# Altium PCB EPCU.PcbDoc
Units mil, origin at the board's own origin, x right, y up, seen from the top; angles counter-clockwise.
Board outline 6000 x 4000 mil, 2 copper layers (Top Layer, Bottom Layer); 99 components, 82 nets, 364 pads, 0 vias.
Unrouted connection lines stored in the file: 264.
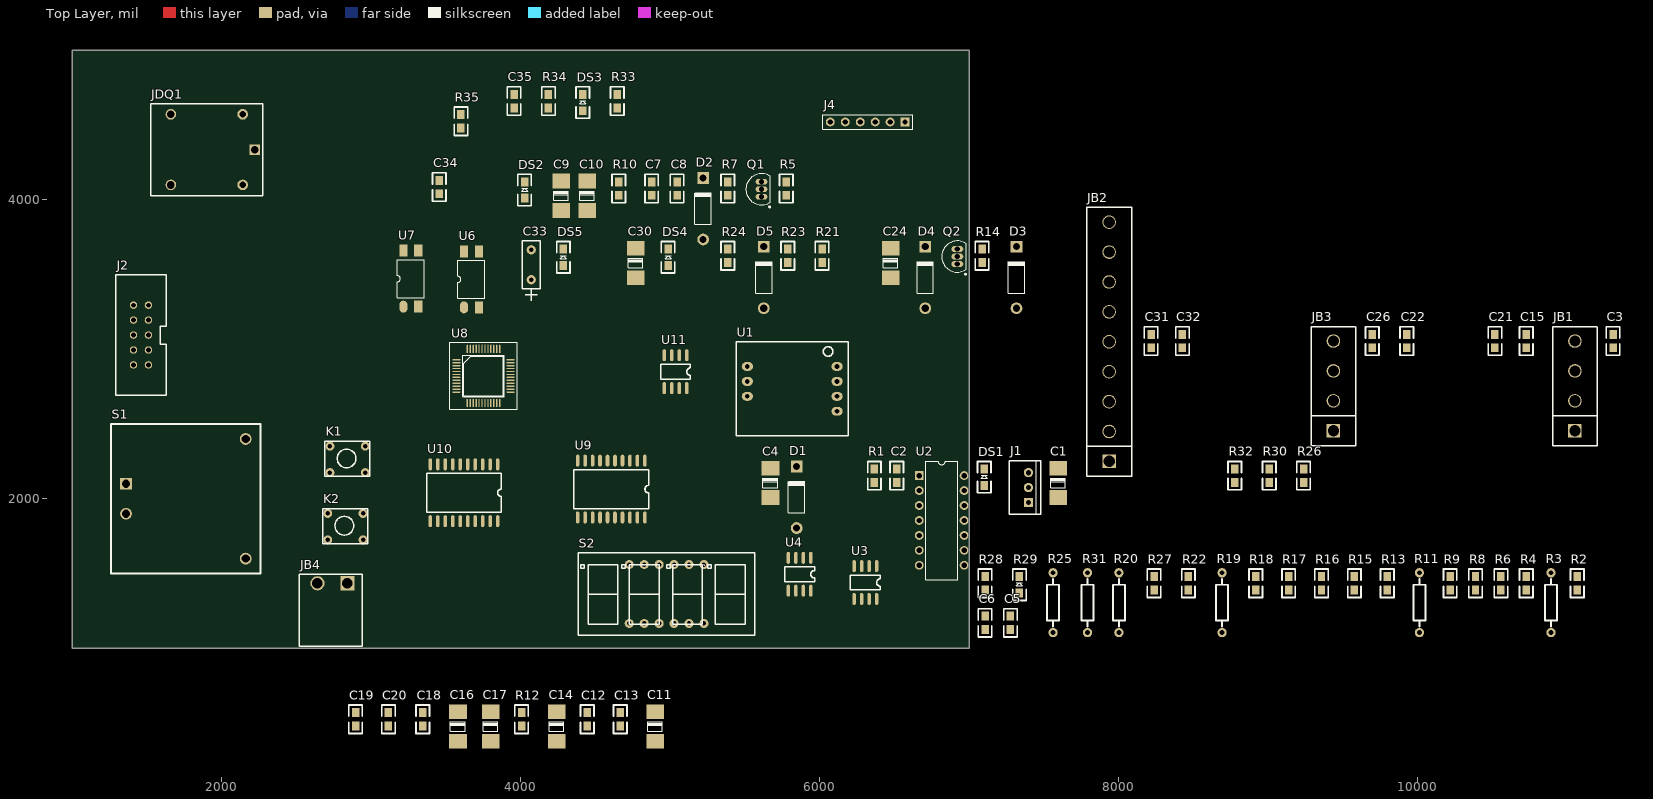
[diagram p0: Top Layer view]
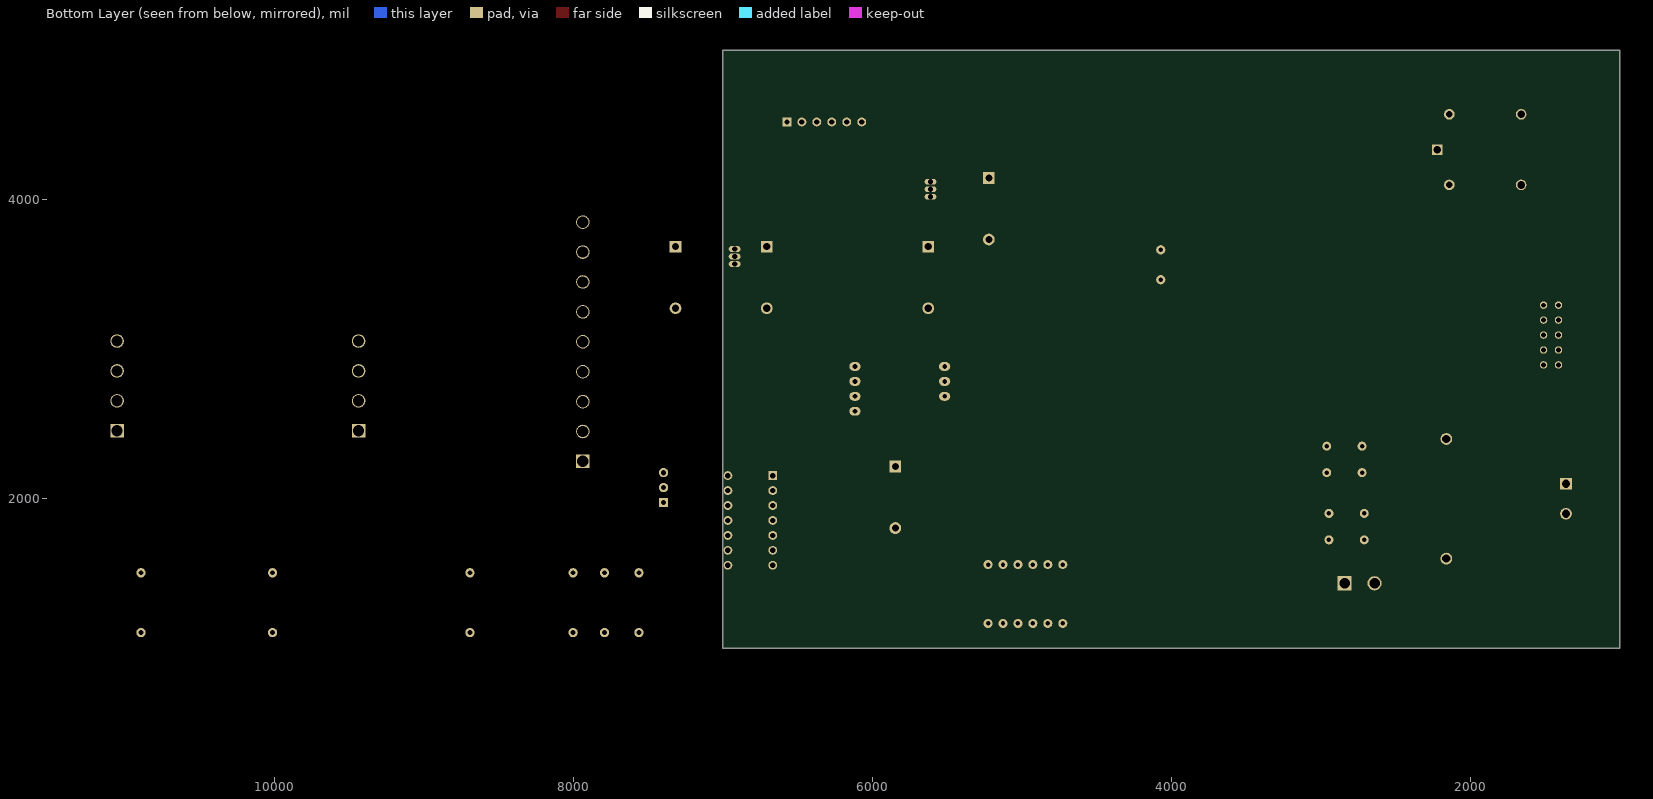
[diagram p1: Bottom Layer view, seen from below]

## Layer stack, top to bottom
Top Solder: solder mask 0.4, Solder Resist, Dk 3.5
Top Layer: signal copper 1.4
Dielectric 1: dielectric 12.6, FR-4, Dk 4.8
Bottom Layer: signal copper 1.4
Bottom Solder: solder mask 0.4, Solder Resist, Dk 3.5

## Board outline
1000,1000 7000,1000 7000,5000 1000,5000

## Design rules (kind name [scope] priority, off if disabled: settings)
Clearance [All] p1: gap=10
PolygonConnect [All] p1: connectstyle=Relief reliefconductorwidth=10 reliefentries=4 polygonreliefangle="90 Angle" airgapwidth=10
RoutingVias [All] p1: holewidth=28 width=50 viastyle="Through Hole" minholewidth=28 minwidth=50 maxholewidth=28 maxwidth=50
SolderMaskExpansion [All] p1: expansion=4
Width [All] p1: maxlimit=10 minlimit=10 preferedwidth=10
30 further rules are at their usual default settings.

## Components (designator, comment, footprint, x,y, rotation, side; value= is the part's Value field where it differs from the comment)
C1 "10uF/16V/C" 106E 7595,2205 r90 top
C2 "0.1uF" 0805 6515,2110 r90 top
C3 "104/50V" 0805 11305,3010 r90 top
C4 "10uF/16V/C" 106E 5670,2205 r90 top
C5 "104" 0805 7275,1125 r90 top
C6 "104/50V" 0805 7105,1125 r90 top
C7 "1uF" 0805 4875,4030 r90 top
C8 "0.1uF" 0805 5045,4030 r90 top
C9 "10uF" 106E 4270,4125 r90 top
C10 "10uF" 106E 4445,4125 r90 top
C11 "10uF/16V/C" 106E 4900,575 r90 top
C12 "0.1uf" 0805 4445,480 r90 top
C13 "0.1uf" 0805 4665,480 r90 top
C14 "4.7uF" 106E 4240,575 r90 top
C15 "104" 0805 10725,3010 r90 top
C16 "10uF" 106E 3580,575 r90 top
C17 "10uF" 106E 3800,575 r90 top
C18 "0.1uf" 0805 3345,480 r90 top
C19 "0.1uf" 0805 2895,480 r90 top
C20 "0.1uf" 0805 3115,480 r90 top
C21 "104/50V" 0805 10515,3010 r90 top
C22 "104/50V" 0805 9925,3010 r90 top
C24 "10uF/16V/C" 106E 6475,3675 r90 top
C26 "104" 0805 9695,3010 r90 top
C30 "10uF/16V/C" 106E 4770,3675 r90 top
C31 "104/50V" 0805 8215,3010 r90 top
C32 "104" 0805 8425,3010 r90 top
C33 "10uF" RB.2/.4 4070,3465 r90 top
C34 "104" 0805 3455,4040 r90 top
C35 "104" 0805 3955,4615 r90 top
D1 "1N4007" DO-41 5845,2010 r90 top
D2 "1N4007" DO-41 5220,3940 r90 top
D3 "1N4007" DO-41 7315,3480 r90 top
D4 "1N4007" DO-41 6705,3480 r90 top
D5 "Diode 1N4001" DO-41 5625,3480 r90 top
DS1 "red" 1206DIODE#1 7135,2105 r90 top
DS2 "red" 1206DIODE#1 4060,4025 r90 top
DS3 "green" 1206DIODE#1 4450,4610 r90 top
DS4 "LED1" 1206DIODE#1 5020,3575 r90 top
DS5 "LED1" 1206DIODE#1 4320,3575 r90 top
J1 "HEADER 3" 254-3 7395,1975 r90 top
J2 "JTAG" DC3-10P 1510,2895 r90 top
J4 "Header 6" HDR1X6 6570,4520 r180 top
JB1 "CON4" SIP4 11050,2455 r90 top
JB2 "CON9" SIP9 7935,2250 r90 top
JB3 "CON4" SIP4 9435,2455 r90 top
JB4 "CON2" POWER2 2840,1435 r180 top
JDQ1 "RELAY" jidianqi_12VDC 2220,4335 r0 top
K1 "KEY6" KEY6 2960,2175 r90 top
K2 "KEY6" KEY6 2945,1725 r90 top
Q1 "9013" TO-226-AA 5610,4070 r0 top
Q2 "9013" TO-226-AA 6920,3620 r0 top
R1 "4.7K" 0805 6365,2110 r90 top
R2 "10K" 0805 11065,1390 r90 top
R3 "250欧" AXIAL0.4 10890,1105 r90 top
R4 "10K" 0805 10725,1390 r90 top
R5 "1K" 0805 5775,4030 r90 top
R6 "1K" 0805 10555,1390 r90 top
R7 "1K" 0805 5385,4030 r90 top
R8 "10K" 0805 10385,1390 r90 top
R9 "10K" 0805 10215,1390 r90 top
R10 "2R" 0805 4655,4030 r90 top
R11 "250欧" AXIAL0.4 10010,1105 r90 top
R12 "4.7K" 0805 4005,480 r90 top
R13 "10K" 0805 9795,1390 r90 top
R14 "0R" 0805 7085,3580 r90 top
R15 "10K" 0805 9575,1390 r90 top
R16 "1K" 0805 9355,1390 r90 top
R17 "10K" 0805 9135,1390 r90 top
R18 "10K" 0805 8915,1390 r90 top
R19 "250欧" AXIAL0.4 8690,1105 r90 top
R20 "100K欧" AXIAL0.4 8000,1105 r90 top
R21 "4.7K" 0805 6015,3580 r90 top
R22 "511" 0805 8465,1390 r90 top
R23 "4.7K" 0805 5785,3580 r90 top
R24 "4.7K" 0805 5385,3580 r90 top
R25 "8.87K" AXIAL0.4 7560,1105 r90 top
R26 "511" 0805 9235,2110 r90 top
R27 "5.1K" 0805 8235,1390 r90 top
R28 "511" 0805 7105,1390 r90 top
R29 "511" 1206DIODE#2 7335,1370 r90 top
R30 "511" 0805 9005,2110 r90 top
R31 "250欧" AXIAL0.4 7790,1105 r90 top
R32 "511" 0805 8775,2110 r90 top
R33 "4.7K" 0805 4645,4615 r90 top
R34 "4.7K" 0805 4185,4615 r90 top
R35 "4.7K" 0805 3600,4480 r90 top
S1 "HDW24S5" HDW24S5 1360,2100 r0 top
S2 "LEDS4-14" LEDS4-14 5225,1560 r180 top
U1 "" CYM1050T 6115,2885 r180 top
U2 "LM324" lm324 6665,2155 r0 top
U3 "IRF7853PBF" SOP-8 6380,1550 r270 top
U4 "IRF7853PBF" SO-8 5940,1605 r270 top
U6 "TLP521-1" TLP521-1 3620,3280 r90 top
U7 "TLP521-1" TLP521-1 3215,3285 r90 top
U8 "C8051F500" TQFP-48 3570,2930 r0 top
U9 "74ALS574" SOL-20 4830,2255 r270 top
U10 "74ALS574" SOL-20 3845,2230 r270 top
U11 "AT24C64A" SO-8 5110,2960 r270 top

## Footprints (in the part's own frame and the unit in brackets; to place one, negate y for a bottom-side part, rotate by r counter-clockwise, add the part's x,y. Pads: shape width x height; smd on the part's side, far side on the other; paste and mask are expansions set on the pad)
106E [mm]
  rect 2.5x3 smd: 1(0,0) 2(-5,0)
  silkscreen extent -3.3,-1.2 -1.7,1.3
254-3 [mil]
  rect 62x62 hole 35.43: 1(0,0)
  round 62 hole 35.43: 2(100,0) 3(200,0)
  silkscreen extent -79,-82 280,127
0805 [mil]
  rect 60x50 smd: 1(0,0) 2(90,0)
  silkscreen extent -50,-45 140,45
1206DIODE#1 [mil]
  rect 60x50 smd: 1(-15,35) 2(95,35)
  silkscreen extent -65,-10 145,80
1206DIODE#2 [mil]
  rect 60x50 smd: 1(0,0) 2(110,0)
  silkscreen extent -50,-45 160,45
AXIAL0.4 [mil]
  round 62 hole 32: 1(0,0) 2(400,0)
  silkscreen extent 40,-40 360,40
CYM1050T [mm]
  oval 1.9x1.5 hole 0.8: 1(0,0) 2(0,2.54) 3(0,5.08) 4(0,7.62) 6(15.24,5.08) 7(15.24,2.54) 8(15.24,0)
  silkscreen extent -1.88,-4.19 17.12,11.81
DC3-10P [mil]
  round 50 hole 32: 1(0,0) 2(0,100) 3(100,0) 4(100,100) 5(200,0) 6(200,100) 7(300,0) 8(300,100) 9(400,0) 10(400,100)
  silkscreen extent -203,-120 602,218
DO-41 [mm] "Diode, Axial; Body 5.2 x 2.7 mm (LxDia. max), Lead Dia. 0.86 mm (max)"
  round 2 hole 1.2: 1(-5.23,0)
  rect 2x2 hole 1.2: 2(5.23,0)
  silkscreen extent -2.65,-1.4 2.75,1.4
HDR1X6 [mm] "Connector; Header; 6 Position"
  rect 1.5x1.5 hole 0.9: 1(0,0)
  round 1.5 hole 0.9: 2(2.54,0) 3(5.08,0) 4(7.62,0) 5(10.16,0) 6(12.7,0)
  silkscreen extent -1.27,-1.27 13.97,1.27
HDW24S5 [mm]
  rect 2x2 hole 1.4: 1(0,0)
  round 2 hole 1.4: 2(0,-5.08) 3(20.32,-12.7) 5(20.32,7.62)
  silkscreen extent -2.54,-15.24 22.86,10.16
jidianqi_12VDC [mm]
  rect 1.8x1.8 hole 1.3: 1(0,0)
  round 1.8 hole 1.1: 2(-2.032,5.994) 5(-2.032,-5.994)
  round 1.8 hole 1.3: 3(-14.224,5.994) 4(-14.224,-5.994)
  silkscreen extent -17.65,-7.85 1.4,7.77
KEY6 [mil]
  round 60 hole 30: 1(0,236.22) 1(0,0) 2(177.17,236.22) 2(177.17,0)
  silkscreen extent -25,-30 210,270
LEDS4-14 [mil]
  round 60 hole 30: 1(100,393.7) 2(500,393.7) 3(300,0) 4(100,0) 5(0,0) 6(200,393.7) 7(400,0) 8(200,0) 9(0,393.7) 10(300,393.7) 11(400,393.7) 12(500,0)
  silkscreen extent -341,-79 841,472
lm324 [mm]
  rect 1.5x1.5 hole 0.9: 1(0,0)
  round 1.5 hole 0.9: 2(0,-2.54) 3(0,-5.08) 4(0,-7.62) 5(0,-10.16) 6(0,-12.7) 7(0,-15.24) 8(7.62,-15.24) 9(7.62,-12.7) 10(7.62,-10.16) 11(7.62,-7.62) 12(7.62,-5.08) 13(7.62,-2.54) 14(7.62,0)
  silkscreen extent 1.06,-17.72 6.56,2.48
POWER2 [mm]
  rect 2.4x2.4 hole 1.778: 1(0,0)
  round 2.4 hole 1.778: 2(5.08,0)
  silkscreen extent -2.54,-1.52 8.13,10.67
RB.2/.4 [mil]
  round 62 hole 28: 1(0,0) 2(200,0)
  silkscreen extent -140,-60 260,60
SIP4 [mm]
  rect 2.3x2.3 hole 1.924: 1(0,0)
  round 2.3 hole 1.924: 2(5.08,0) 3(10.16,0) 4(15.24,0)
  silkscreen extent -2.54,-3.81 17.7,3.81
SIP9 [mm]
  rect 2.3x2.3 hole 1.924: 1(0,0)
  round 2.3 hole 1.924: 2(5.08,0) 3(10.16,0) 4(15.24,0) 5(20.32,0) 6(25.4,0) 7(30.48,0) 8(35.56,0) 9(40.64,0)
  silkscreen extent -2.54,-3.81 43.18,3.81
SO-8 [mil]
  oval 80x24 smd: 1(-0.27,-0.28) 2(-0.27,-50.28) 3(-0.27,-100.28) 4(-0.27,-150.28) 5(219.73,-150.28) 6(219.73,-100.28) 7(219.73,-50.28) 8(219.73,-0.28)
  silkscreen extent 60,-175 160,25
SOL-20 [mil]
  oval 80x24 smd: 1(0,0) 2(0,-50) 3(0,-100) 4(0,-150) 5(0,-200) 6(0,-250) 7(0,-300) 8(0,-350) 9(0,-400) 10(0,-450) 11(380,-450) 12(380,-400) 13(380,-350) 14(380,-300) 15(380,-250) 16(380,-200) 17(380,-150) 18(380,-100) 19(380,-50) 20(380,0)
  silkscreen extent 60,-475 320,25
SOP-8 [mil]
  oval 80x24 smd: 1(0,0) 2(0,-50) 3(0,-100) 4(0,-150) 5(220,-150) 6(220,-100) 7(220,-50) 8(220,0)
  silkscreen extent 60,-175 160,25
TLP521-1 [mil]
  oval 80x55.12 smd: 1(0,0)
  rect 80x55.12 smd: 2(0,-100) 3(375,-100) 4(375,0)
  silkscreen extent 60,-140 315,40
TO-226-AA [mm] "TO, Flat Index; 3 In-Line, Axial Leads; Body Dia. 4.8mm; Leads 0.55 x 0.51 mm (max)"
  oval 2x1 hole 0.9: 1(0,-1.27) 2(0,0) 3(0,1.27)
  silkscreen extent -2.65,-3.13 1.52,2.65, body extent -2.66,-2.66 1.52,2.66, height 5.33
TQFP-48 [mm]
  rect 1.4x0.22 smd: 1(-0.011,0)
  oval 1.4x0.22 smd: 2(-0.011,-0.5) 3(-0.011,-1) 4(-0.011,-1.5) 5(-0.011,-2) 6(-0.011,-2.5) 7(-0.011,-3) 8(-0.011,-3.5) 9(-0.011,-4) 10(-0.011,-4.5) 11(-0.011,-5) 12(-0.011,-5.5) 25(9.189,-5.5) 26(9.189,-5) 27(9.189,-4.5) 28(9.189,-4) 29(9.189,-3.5) 30(9.189,-3) 31(9.189,-2.5) 32(9.189,-2) 33(9.189,-1.5) 34(9.189,-1) 35(9.189,-0.5) 36(9.189,0)
  oval 0.22x1.4 smd: 13(1.839,-7.35) 14(2.339,-7.35) 15(2.839,-7.35) 16(3.339,-7.35) 17(3.839,-7.35) 18(4.339,-7.35) 19(4.839,-7.35) 20(5.339,-7.35) 21(5.839,-7.35) 22(6.339,-7.35) 23(6.839,-7.35) 24(7.339,-7.35) 37(7.339,1.85) 38(6.839,1.85) 39(6.339,1.85) 40(5.839,1.85) 41(5.339,1.85) 42(4.839,1.85) 43(4.339,1.85) 44(3.839,1.85) 45(3.339,1.85) 46(2.839,1.85) 47(2.339,1.85) 48(1.839,1.85)
  silkscreen extent -1.11,-8.45 10.29,2.95

## Part data
C1 C4 C9 C10 C11 C14 C16 C17 C24 C30: library part "CAPACITOR POL", "Capacitor"
C2: library part CAP_S
C3 C5 C6 C7 C8 C12 C13 C15 C18 C19 C20 C21 C22 C26 C31 C32 C34 C35: library part CAP, "Capacitor"
C33: library part Pro12.tmp_22uF_5
D1 D2 D3 D4: library part "Diode 1N4007", "1 Amp General Purpose Rectifier"
D5: "1 Amp General Purpose Rectifier"
DS1 DS2 DS3: library part LED
DS4 DS5: library part LED, "1206"
J2: library part "HEADER 5X2"
J4: "Header, 6-Pin"
JB1 JB3: "zhijiao"
JB2: "connector"
Q1 Q2: library part NPN, "NPN Bipolar Transistor"
R1 R5 R7 R10 R12 R14 R21 R23 R24 R33 R34 R35: library part RES-S
R2 R3 R4 R6 R8 R9 R11 R13 R15 R16 R17 R18 R19 R20 R22 R25 R26 R27 R28 R29 R30 R31 R32: library part RES2
U1: library part CTM1050T
U8: library part C8051F500/1/4/5
U11: library part AT24CXXA

## Nets (pads, with @x,y where several pads share a name; then routed paths per layer and width w, separated by ;. In a path a pad name is that pad's centre, name@x,y a point inside that pad or via, vN(x,y) a via of type N, cw(c..) or ccw(c..) an arc to the next point about the centre after c; other vN are vias at no path point)
74V_SIGNAL: R29.2 U7.3 U8.35
74VGND: C31.2 JB3.4 R25.1 R28.2
+5V: C1.1 C2.2 C9.1 C12.2 C33.1 C34.1 C35.1 J2.10 J4.2 J4.4 J4.6 R5.1 R21.2 R22.2 R23.1 R24.1 R33.1 R34.1 R35.2 S1.3 U1.1 U7.4 U8.2 U8.3 U9.20 U10.20 U11.8
+24V: C3.1 C10.1 C13.2 C21.1 D1.2 D3.2 JB1.1 JB1.3 JB2.1 JB2.3 JB2.5 JB2.7 JB4.2 R1.2 R2.2 R12.2 R13.2 S1.2 U2.4 U6.4
C2D: J2.4 U8.11
CAN_RX: U1.4 U8.43
CAN_TX: U1.3 U8.44
DB3_0: U8.26 U9.2 U10.2
DB3_1: U8.25 U9.3 U10.3
DB3_2: U8.24 U9.4 U10.4
DB3_3: U8.23 U9.5 U10.5
DB3_4: U8.22 U9.6 U10.6
DB3_5: U8.21 U9.7 U10.7
DB3_6: U8.20 U9.8 U10.8
DB3_7: U8.19 U9.9 U10.9
DIG1: S2.9 U10.19
DIG2: S2.10 U10.18
DIG3: S2.11 U10.17
DIG4: S2.12 U10.16
DULA: U8.18 U9.11
GND: C1.2 C2.1 C4.2 C5.2 C6.2 C7.1 C8.1 C9.2 C10.2 C11.2 C12.1 C13.1 C15.2 C16.2 C19.1 C22.2 C24.2 C26.2 C30.2 C32.2 C33.2 C34.2 C35.2 D2.1 D4.1 D5.1 DS3.2 DS4.2 DS5.2 J2.2 J2.3 J2.9 JB2.9 JB4.1 JDQ1.2 K1.2 K2.2 Q1.1 Q2.1 R3.2 R8.1 R9.1 R11.2 R14.2 R17.1 R18.1 R19.2 R31.2 S1.1 S1.5 U1.2 U2.11 U3.1 U3.2 U3.3 U4.1 U4.2 U4.3 U8.6 U9.1 U9.10 U10.1 U10.10 U11.1 U11.2 U11.3 U11.4 U11.7
GNDA: C14.2 C17.2 C18.1 C20.1 R14.1 U8.7
KEY1: K1.1 R34.2 U8.30
KEY2: K2.1 R35.1 U8.29
MOS1: C6.1 R6.1 R9.2 U8.28
MOS2: C22.1 R16.1 R18.2 U8.27
NetC3_2: C3.2 Q1.3 R2.1 R4.2 R8.2
NetC5_1: C5.1 JB2.2 R3.1 U2.3
NetC7_2: C7.2 C8.2 J2.5 R5.2 R7.1
NetC15_1: C15.1 JB2.4 R11.1 U2.5
NetC21_2: C21.2 Q2.3 R13.1 R15.2 R17.2
NetC26_1: C26.1 JB2.6 R19.1 U2.10
NetC31_1: C31.1 R20.1 R25.2 U7.1
NetC32_1: C32.1 JB2.8 R31.1 U2.12
NetD1_1: D1.1 DS1.2 JB1.2 U3.5 U3.6 U3.7 U3.8
NetD2_2: D2.2 R4.1 U3.4
NetD3_1: D3.1 DS2.2 JB1.4 U4.5 U4.6 U4.7 U4.8
NetD4_2: D4.2 R15.1 U4.4
NetD5_2: D5.2 JDQ1.5 R27.2 U6.3
NetDS1_1: DS1.1 R1.1
NetDS2_1: DS2.1 R12.1
NetDS3_1: DS3.1 R33.2
NetDS4_1: DS4.1 R27.1
NetDS5_1: DS5.1 R29.1
NetJ1_1: J1.1 U1.8
NetJ1_2: J1.2 U1.7
NetJ1_3: J1.3 U1.6
NetJ4_1: J4.1 R26.1
NetJ4_3: J4.3 R30.1
NetJ4_5: J4.5 R32.1
NetJB3_1: JB3.1 JDQ1.1
NetJB3_2: JB3.2 JDQ1.3
NetJB3_3: JB3.3 R20.2
NetQ1_2: Q1.2 R6.2
NetQ2_2: Q2.2 R16.2
NetR21_1: R21.1 R26.2 U8.39
NetR22_1: R22.1 U6.1
NetR23_2: R23.2 R30.2 U8.38
NetR24_2: R24.2 R32.2 U8.37
NetR28_1: R28.1 U7.2
NetS2_1: S2.1 U9.19
NetS2_2: S2.2 U9.18
NetS2_3: S2.3 U9.17
NetS2_4: S2.4 U9.16
NetS2_5: S2.5 U9.15
NetS2_6: S2.6 U9.14
NetS2_7: S2.7 U9.13
NetS2_8: S2.8 U9.12
P2.4: U6.2 U8.36
RST: J2.7 R7.2 U8.12
RXD: U8.45
SCL_P1.2: U8.40 U11.6
SDA_P1.1: U8.41 U11.5
TXD: U8.46
VDD: C16.1 C19.2 R10.2 U8.4
VDDA: C17.1 C20.2 R10.1 U8.5
VREF: C14.1 C18.2 U8.8
WELA: U8.17 U10.11
YLCGQ1_IN: C4.1 U2.1 U2.2 U8.34
YLCGQ2_IN: C11.1 U2.6 U2.7 U8.33
YLCGQ3_IN: C24.1 U2.8 U2.9 U8.32
YLCGQ4_IN: C30.1 U2.13 U2.14 U8.31
pads on no net: J2.1 J2.6 J2.8 JDQ1.4 U8.1 U8.9 U8.10 U8.13 U8.14 U8.15 U8.16 U8.42 U8.47 U8.48 U10.12 U10.13 U10.14 U10.15